# Altium PCB PCB1.PcbDoc
Units mm, origin at the board's own origin, x right, y up, seen from the top; angles counter-clockwise.
Board outline 139.5 x 60 mm, 4 copper layers (Top Layer, Signal Layer 1, Signal Layer 2, Bottom Layer), stack 1.57 mm thick; 143 components, 124 nets, 524 pads, 41 vias.
Unrouted connection lines stored in the file: 326.
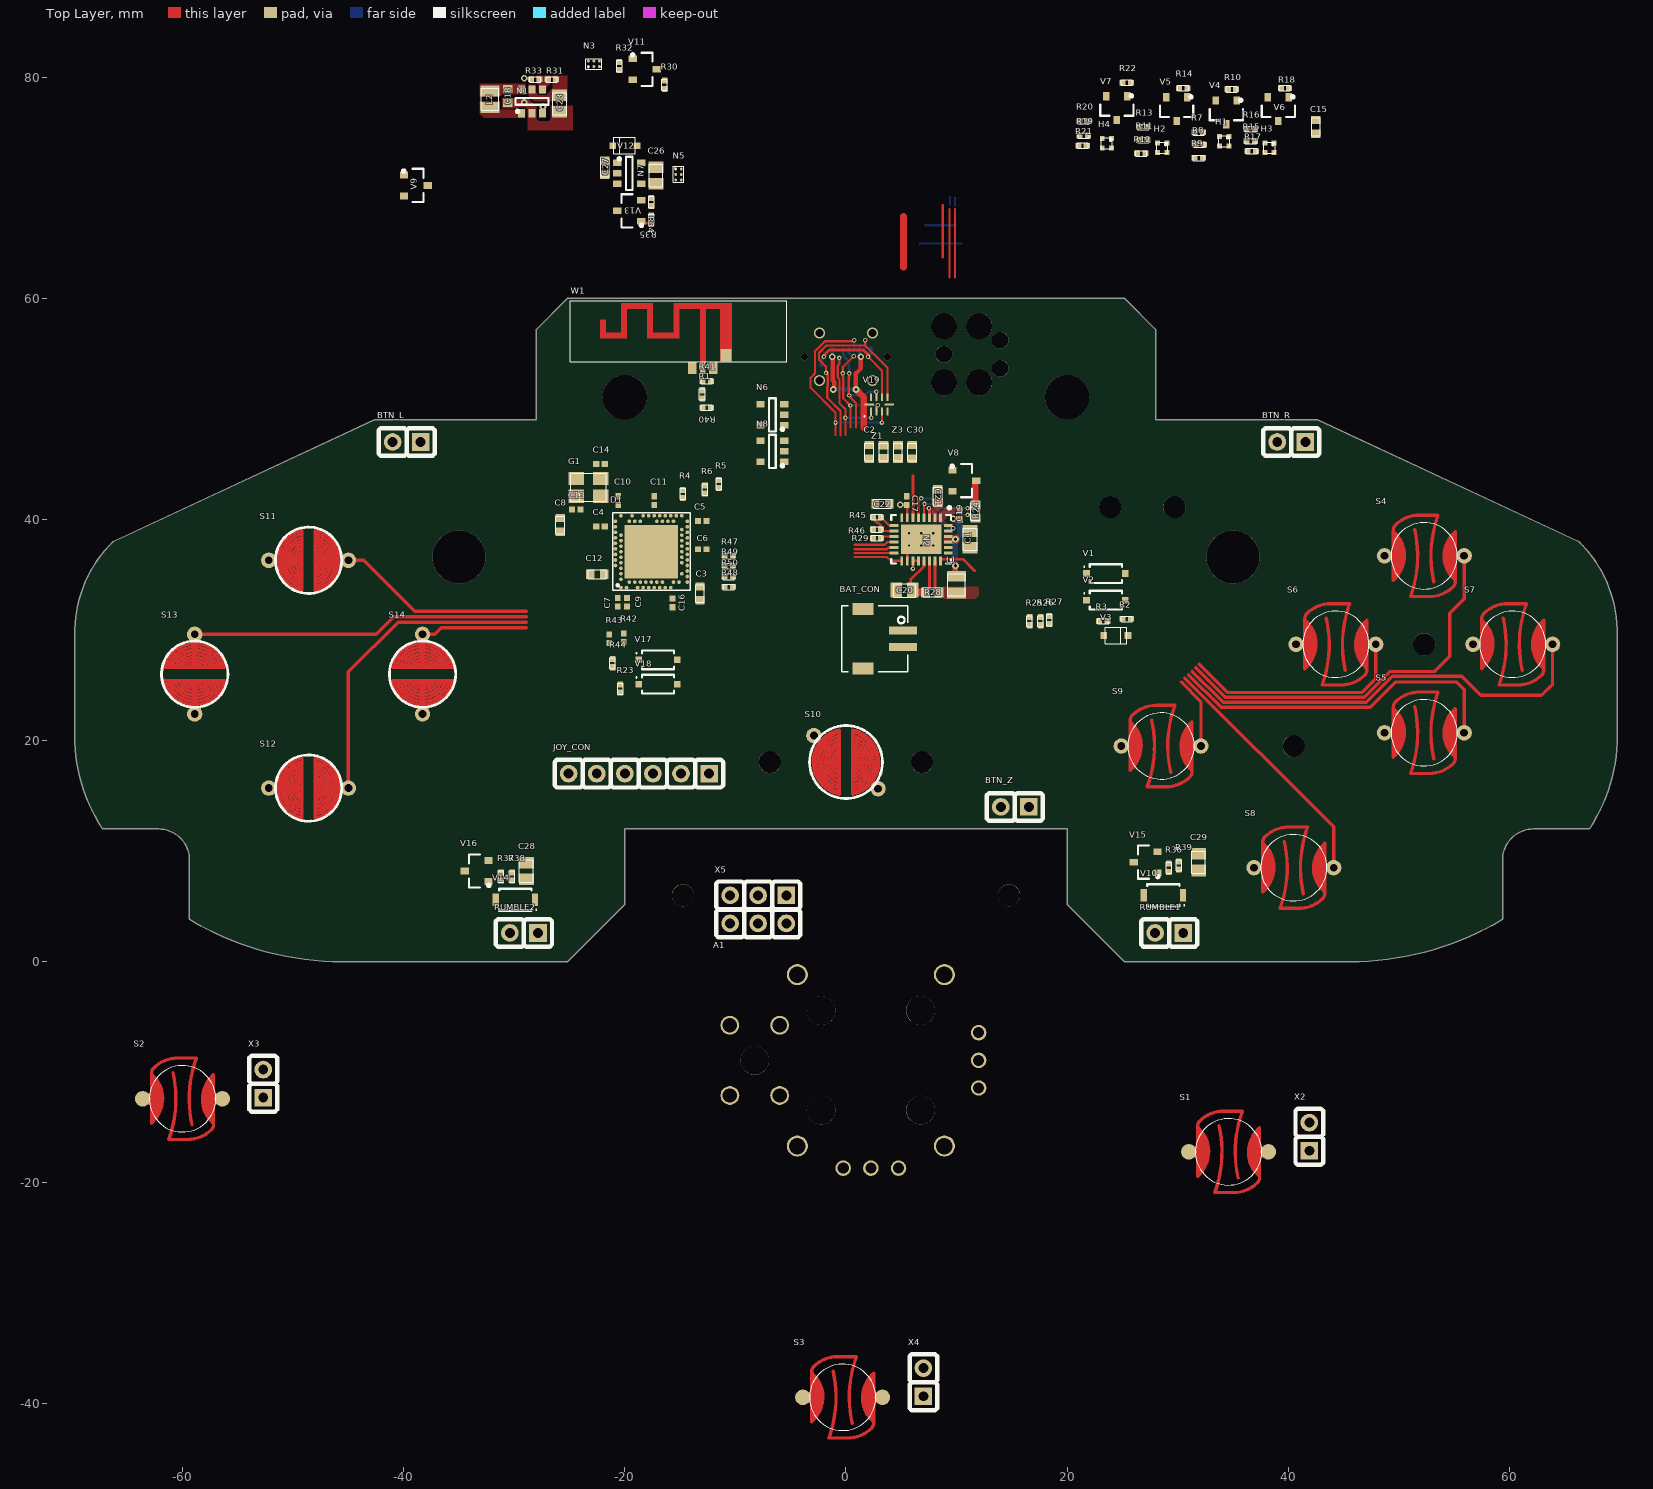
[diagram p0: Top Layer view]
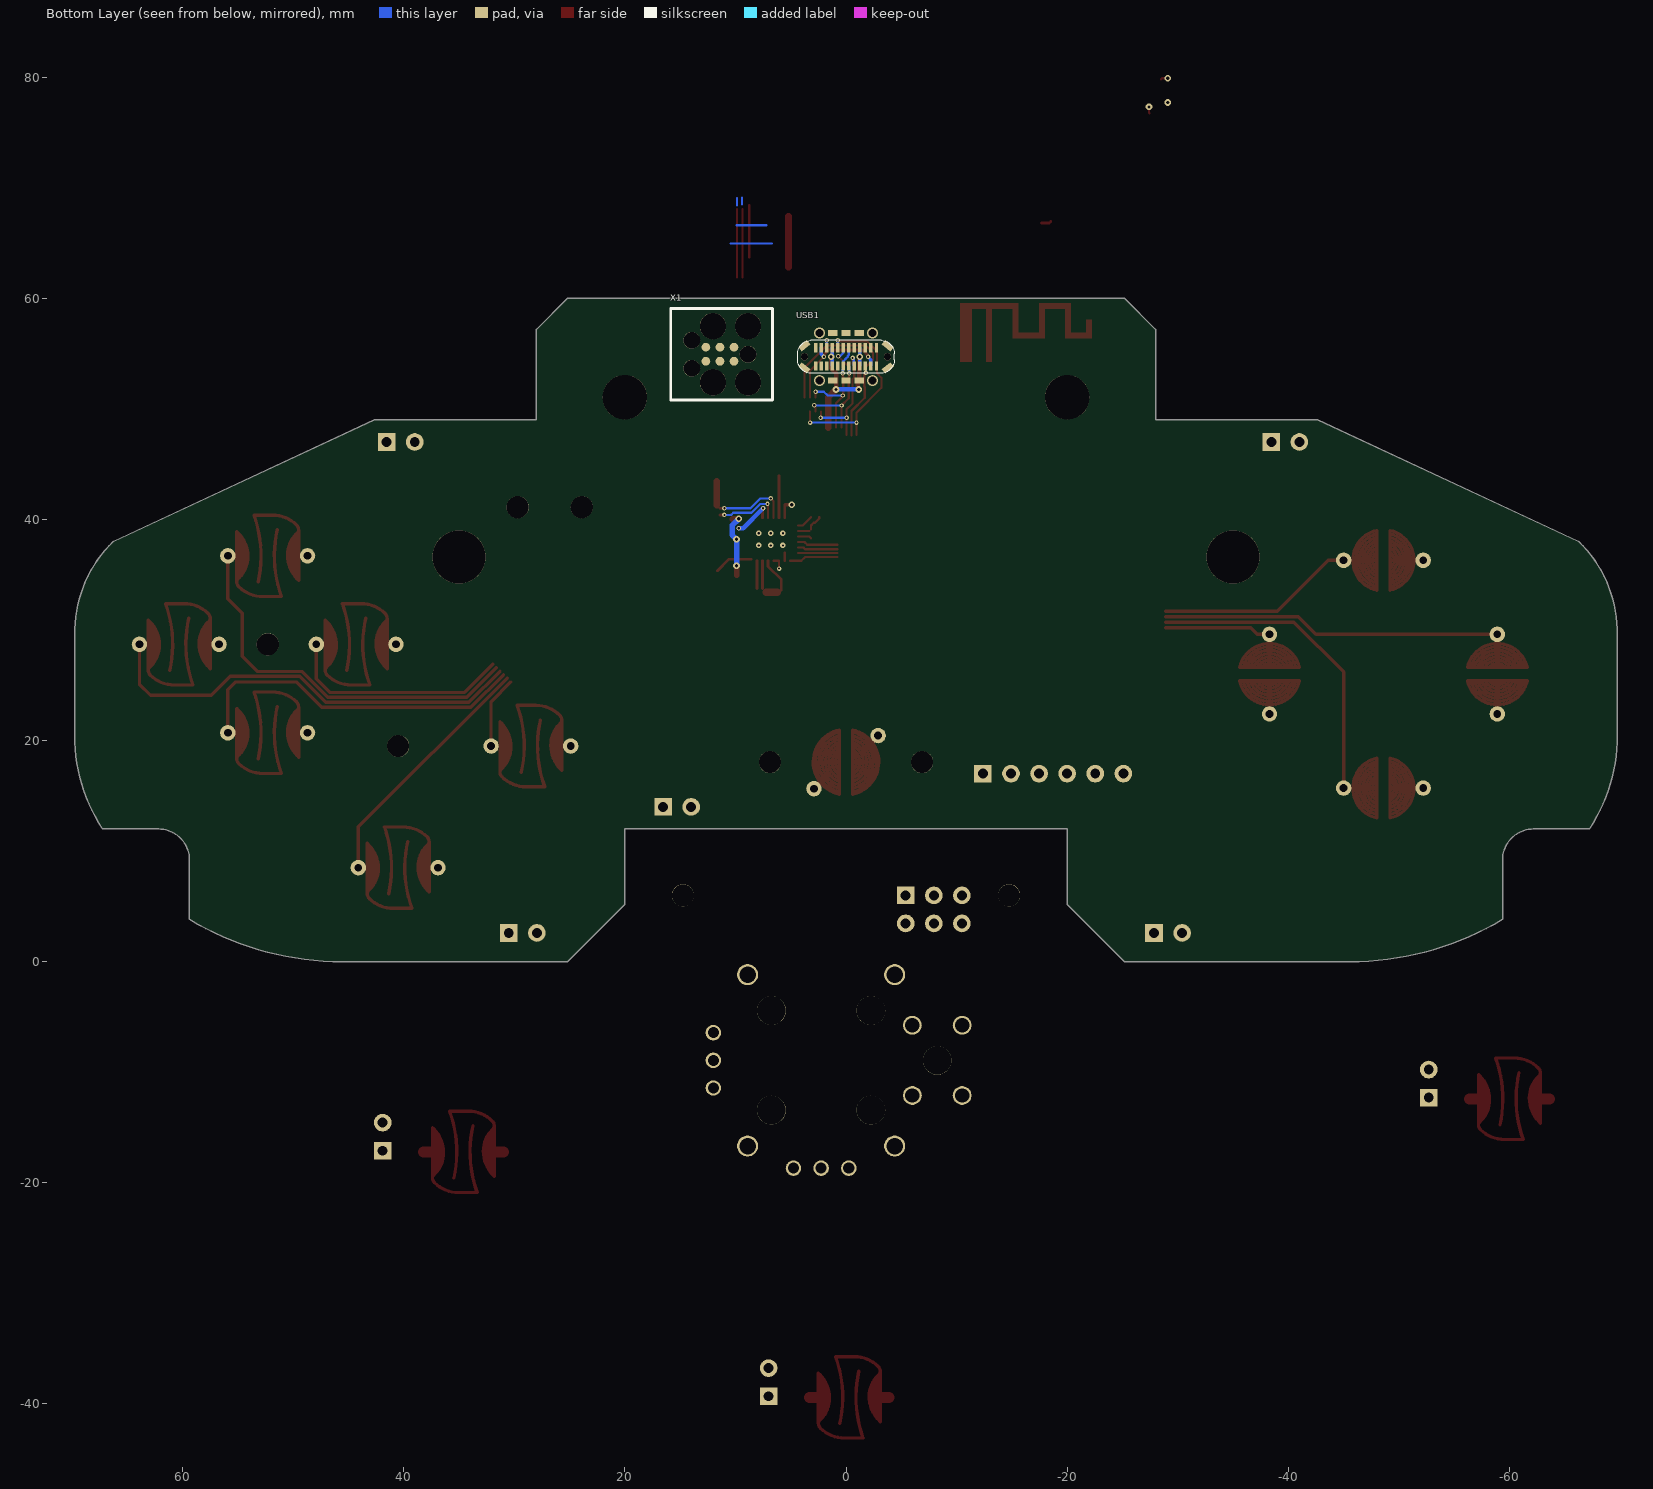
[diagram p1: Bottom Layer view, seen from below]

## Layer stack, top to bottom
Top Solder: solder mask 0.0102, Solder Resist, Dk 3.5
Top Layer: signal copper 0.035
Dielectric 1: prepreg 0.1, Dk 3.1
Signal Layer 1: signal copper 0.0175
Dielectric 3: core 1.265, FR-4, Dk 4.2
Signal Layer 2: signal copper 0.0175
Dielectric 5: prepreg 0.1, Dk 3.1
Bottom Layer: signal copper 0.035
Bottom Solder: solder mask 0.0102, Solder Resist, Dk 3.5

## Board outline
-59.375,3.85 -59.375,9.2 ccw(c-62.175,9.2) -62.175,12 -67.248,12 -67.239,12.006 cw(c-54.373,20.425) -69.748,20.5 -69.748,30.088 -69.742,30.075 cw(c-58.3,29.775) -66.268,37.992 -66.25,38 -42.65,49 -27.998,49 -27.998,57.175 -28,57.175 -25.173,60 25.175,60 28,57.175 28,49 42.652,49 66.252,38 66.27,37.992 cw(c58.302,29.775) 69.744,30.075 69.75,30.075 69.75,20.5 cw(c54.375,20.425) 67.241,12.006 67.25,12 62.177,12 ccw(c62.177,9.2) 59.377,9.2 59.377,3.85 59.368,3.827 cw(c45.574,26.761) 45.583,-0.002 45.574,0 25.2,0 20,5.2 20,12 -19.998,12 -19.998,5.2 -25.198,0 -45.572,0 -45.581,-0.002 cw(c-45.572,26.761)

## Design rules (kind name [scope] priority, off if disabled: settings)
Clearance [All] p1: gap=0.15 ignorepadtopadclearanceinfootprint=FALSE
ComponentClearance [All] p1: gap=0.1 collisioncheckmode=3 verticalgap=5 showdistances=FALSE
DiffPairsRouting DiffPair_DIFF90DiffPairsRouting [InDifferentialPairClass('DIFF90')] p1: maxlimit=0.3 minlimit=0.3 mostfreqgap=0.3 toplayer_minwidth=0.2 toplayer_maxwidth=0.2 toplayer_prefwidth=0.2 midlayer1_minwidth=0.2 midlayer1_maxwidth=0.2 midlayer1_prefwidth=0.2 midlayer2_minwidth=0.2 midlayer2_maxwidth=0.2 midlayer2_prefwidth=0.2 bottomlayer_minwidth=0.2 bottomlayer_maxwidth=0.2 bottomlayer_prefwidth=0.2 maxuncoupledlength=0.127
DiffPairsRouting [All] p2: maxlimit=0.254 minlimit=0.254 mostfreqgap=0.254 toplayer_minwidth=0.381 toplayer_maxwidth=0.381 toplayer_prefwidth=0.381 midlayer1_minwidth=0.381 midlayer1_maxwidth=0.381 midlayer1_prefwidth=0.381 midlayer2_minwidth=0.381 midlayer2_maxwidth=0.381 midlayer2_prefwidth=0.381 bottomlayer_minwidth=0.381 bottomlayer_maxwidth=0.381 bottomlayer_prefwidth=0.381 maxuncoupledlength=12.7
HoleSize [All] p1: absolutevalues=TRUE maxlimit=6 minlimit=0.3 maxpercent=80.000 minpercent=20.000
HoleToHoleClearance [All] p1: gap=0.3 allowstackedmicrovias=TRUE
MatchedLengths DiffPair_DIFF90MatchedLengths [InDifferentialPairClass('DIFF90')] p1: tolerance=0.127 checknetsindiffpair=TRUE checkdiffpairvsdiffpair=FALSE checkxsignals=FALSE checkothers=FALSE
MinimumSolderMaskSliver [All] p1 off: minsoldermaskwidth=0.2
PolygonConnect [All] p1: connectstyle=Direct reliefconductorwidth=0.254 reliefentries=4 polygonreliefangle="90 Angle" airgapwidth=0.254
RoomDefinition U_USB [InComponentClass('U_USB')] p1 off: confinementstyle=ConfineIn formatcopy=TRUE lockcomponents=FALSE outline -70,-10
RoomDefinition U_Rumble [InComponentClass('U_Rumble')] p2 off: confinementstyle=ConfineIn formatcopy=TRUE lockcomponents=FALSE outline -70,-10
RoomDefinition U_Power [InComponentClass('U_Power')] p3 off: confinementstyle=ConfineIn formatcopy=TRUE lockcomponents=FALSE outline -70,-10
RoomDefinition U_MCU [InComponentClass('U_MCU')] p4 off: confinementstyle=ConfineIn formatcopy=TRUE lockcomponents=FALSE outline -70,-10
RoomDefinition U_LEDs [InComponentClass('U_LEDs')] p5 off: confinementstyle=ConfineIn formatcopy=TRUE lockcomponents=FALSE outline -70,-10
RoomDefinition U_Buttons [InComponentClass('U_Buttons')] p6 off: confinementstyle=ConfineIn formatcopy=TRUE lockcomponents=FALSE outline -70,-10
RoutingVias [All] p1: holewidth=0.3 width=0.6 viastyle="Through Hole" minholewidth=0.2 minwidth=0.4 maxholewidth=0.7 maxwidth=1.4
SilkToSilkClearance [All] p1 off: silktosilkclearance=0.254
SilkToSolderMaskClearance [IsPad] p1 off: minsilkscreentomaskgap=0.254 clearancetoexposedcopper=TRUE
SolderMaskExpansion [All] p1: expansion=0.102
UnRoutedNet [All] p1: checkbadconnections=TRUE
Width Width_SINGLE50 [InNetClass('SINGLE50')] p1: maxlimit=0.22 minlimit=0.22 preferedwidth=0.22
Width [All] p2: maxlimit=1 minlimit=0.15 preferedwidth=0.2 midlayer1_maxwidth=0.7 midlayer2_maxwidth=0.7 minimp=50.000000 maximp=50.000000 favimp=50.000000
22 further rules are at their usual default settings.

## Classes and differential pairs
net class SINGLE50: ANT
component class U_USB: C2 C30 C900 USB1 V19 Z1 Z3 Z900
component class U_Rumble: C28 C29 R36 R37 R38 R39 R800 R801 R802 R803 RUMBLE1 RUMBLE2 V10 V14 V15 V16
component class U_Power: BAT_CON C1 C17 C18 C19 C20 C21 C22 C23 C26 C27 C700 C701 C702 C703 C704 C705 C706 C707 C708 C709 L1 L2 L701 N1 N2 N3 N5 N6 N7 N8 R24 R25 R26 R27 R28 R29 R30 R31 R32 R33 R34 R35 R45 R46 R700 R701 R702 R703 R704 R705 R706 R707 R708 R709 R710 V8 V9 V11 V12 V13
component class U_MCU: C3 C4 C5 C6 C7 C8 C9 C10 C11 C12 C13 C14 C16 C100 C101 C102 C103 C104 C105 C106 C107 C108 C109 D1 G1 R1 R2 R3 R4 R5 R6 R23 R40 R41 R42 R43 R44 R47 R48 R49 R50 R100 R101 V1 V2 V3 V17 V18 V100 V? W1 X1 Z100 Z101
component class U_LEDs: C15 C500 H1 H2 H3 H4 H500 H501 H502 H503 R7 R8 R9 R10 R11 R12 R13 R14 R15 R16 R17 R18 R19 R20 R21 R22 R500 R501 R502 R503 R504 R505 R506 R507 R508 R509 R510 R511 R512 R513 R514 R515 V4 V5 V6 V7
component class U_Buttons: A1 BTN_L BTN_R BTN_Z JOY_CON S1 S2 S3 S4 S5 S6 S7 S8 S9 S10 S11 S12 S13 S14 X2 X3 X4 X5
net class DIFF90: D_N D_P
differential pair class DIFF90: D
differential pair D: +D_P -D_N

## Components (designator, comment, footprint, x,y, rotation, side; value= is the part's Value field where it differs from the comment)
A1 "A_JOYSTICK_MODULE_RKJXK122400Y" A_JOYSTICK_MODULE_RKJXK122400Y 2.25,-8.925 r270 top
BAT_CON "X_SMD_SM4A_2PIN_MALE" SMD_CON_SM4A_2PIN_MALE 3,29.2 r270 top
BTN_L "X_CONNECTOR_P2.54_D0.9_1X2" THT_CON_P2.54_D0.9_1X2 -38.46,47 r180 top locked
BTN_R "X_CONNECTOR_P2.54_D0.9_1X2" THT_CON_P2.54_D0.9_1X2 41.54,47 r180 top locked
BTN_Z "X_CONNECTOR_P2.54_D0.9_1X2" THT_CON_P2.54_D0.9_1X2 16.54,14 r180 top
C1 "C_SMD_CER_4U7_35V_10%_X7R_0805" SMD_CAP_0805 11.2,38.2 r90 top value=4.7u
C2 "C_SMD_CER_1U_16V_10%_X7R_0603" SMD_CAP_0603 2.1,46.1 r270 top value=1u
C3 "C_SMD_CER_4U7_6V3_10%_X5R_0603" SMD_CAP_0603 -13.2,33.3 r90 top value=4.7u
C4 "C_SMD_CER_100N_25V_10%_X7R_0402" SMD_CAP_0402 -22.2,39.35 r0 top value=100n
C5 "C_SMD_CER_100N_25V_10%_X7R_0402" SMD_CAP_0402 -13,39.85 r180 top value=100n
C6 "C_SMD_CER_100N_25V_10%_X7R_0402" SMD_CAP_0402 -13,37.3 r180 top value=100n
C7 "C_SMD_CER_100N_25V_10%_X7R_0402" SMD_CAP_0402 -20.65,32.5 r90 top value=100n
C8 "C_SMD_CER_1U_16V_10%_X7R_0603" SMD_CAP_0603 -25.85,39.5 r90 top value=1u
C9 "C_SMD_CER_100N_25V_10%_X7R_0402" SMD_CAP_0402 -19.8,32.5 r270 top value=100n
C10 "C_SMD_CER_100P_50V_5%_NP0_0402" SMD_CAP_0402 -20.6,41.7 r270 top value=100p
C11 "C_SMD_CER_820P_50V_5%_NP0_0402" SMD_CAP_0402 -17.35,41.7 r270 top value=820p
C12 "C_SMD_CER_1U_16V_10%_X7R_0603" SMD_CAP_0603 -22.5,35.05 r0 top value=1u
C13 "C_SMD_CER_12P_50V_2%_NP0_0402" SMD_CAP_0402 -24.4,40.9 r180 top value=12p
C14 "C_SMD_CER_12P_50V_2%_NP0_0402" SMD_CAP_0402 -22.2,45 r0 top value=12p
C15 "C_SMD_CER_1U_16V_10%_X7R_0603" SMD_CAP_0603 42.5,75.5 r90 top value=1u
C16 "C_SMD_CER_100N_25V_10%_X7R_0402" SMD_CAP_0402 -15.7,32.45 r90 top value=100n
C17 "C_SMD_CER_100N_25V_10%_X7R_0402" SMD_CAP_0402 5.5,41.7 r270 top value=100n
C18 "C_SMD_CER_4U7_6V3_10%_X5R_0603" SMD_CAP_0603 -30.6,78.3 r90 top value=4.7u
C19 "C_SMD_CER_22N_50V_10%_X7R_0402" SMD_CAP_0402 10.3,40.4 r270 top value=22n
C20 "C_SMD_CER_10U_16V_10%_X7R_0805" SMD_CAP_0805 5.3,33.6 r0 top value=10u
C21 "C_SMD_CER_4U7_6V3_10%_X5R_0603" SMD_CAP_0603 8.3,42.1 r270 top value=4.7u
C22 "C_SMD_CER_1U_16V_10%_X7R_0603" SMD_CAP_0603 3.3,41.4 r0 top value=1u
C23 "C_SMD_CER_10U_16V_10%_X7R_0805" SMD_CAP_0805 -25.9,77.6 r90 top value=10u
C26 "C_SMD_CER_22U_16V_10%_X5R_0805" SMD_CAP_0805 -17.2,71.1 r90 top value=22u
C27 "C_SMD_CER_1U_16V_10%_X7R_0603" SMD_CAP_0603 -21.8,71.8 r90 top value=1u
C28 "C_SMD_CER_22U_16V_10%_X5R_0805" SMD_CAP_0805 -28.9,8.2 r270 top value=22u
C29 "C_SMD_CER_22U_16V_10%_X5R_0805" SMD_CAP_0805 31.9,9 r270 top value=22u
C30 "C_SMD_CER_1U_16V_10%_X7R_0603" SMD_CAP_0603 6,46.1 r270 top value=1u
D1 "D_NRF52840_aQFN-73" SMD_aQFN_73_nRF52840 -17.6,37.08 r90 top
G1 "G_SMD_OSC_XTAL_32MHZ_10PPM_8PF_40OHM" SMD_QUARZ_3.2X2.5 -23.3,42.9 r0 top value=32MHz
H1 "H_SMD_LED_RGB_DIFFUSED_5MA_0404" SMD_LED_0404 34.2,74.2 r0 top
H2 "H_SMD_LED_RGB_DIFFUSED_5MA_0404" SMD_LED_0404 28.599,73.6 r0 top
H3 "H_SMD_LED_RGB_DIFFUSED_5MA_0404" SMD_LED_0404 38.299,73.6 r0 top
H4 "H_SMD_LED_RGB_DIFFUSED_5MA_0404" SMD_LED_0404 23.6,74 r0 top
JOY_CON "X_CONNECTOR_P2.54_D0.9_1X6" THT_CON_P2.54_D0.9_1X6 -12.38,17 r180 top
L1 "L_SMD_FERRITE_SHIELD_4U7_1A_20%_0806" SMD_IND_0806 10,34.1 r270 top value=4.7uH
L2 "L_SMD_FERRITE_SHIELD_4U7_1A_20%_0806" SMD_IND_0806 -32.2,78 r270 top value=4.7uH
N1 "N_MCP16251T_SOT-23-6" SMD_SOT_23_6 -28.4,77.8 r90 top
N2 "N_LTC4162EUFD-LAD_QFN-28" QFN50P400X500X80_HS-29N 6.8,38.2 r270 top
N3 "" SMD_WLCSP_6_1.0X1.5 -22.8,81.2 r90 top
N5 "" SMD_WLCSP_6_1.0X1.5 -15.15,71.2 r0 top
N6 "N_MIC2775-46YM5-TR_SOT-23-5" SMD_SOT_23_5 -6.65,49.45 r180 top value=4.68V
N7 "AP2210K-3.3" SMD_SOT_23_5 -19.6,71.3 r0 top
N8 "N_ADM6319B31ARJZ-RL7_SOT-23-5" SMD_SOT_23_5 -6.65,46.15 r180 top value=3.08V
R1 "Dummy" SMD_RES_0402 -13,51.3 r90 top
R2 "R_SMD_THINFILM_10K_0W063_0%5_25PPM_0402" SMD_RES_0402 25.4,31 r0 top value=10k
R3 "R_SMD_THINFILM_10K_0W063_0%5_25PPM_0402" SMD_RES_0402 23.275,30.8 r0 top value=10k
R4 "R_SMD_THICKFILM_22E_0W063_1%_100PPM_0402" SMD_RES_0402 -14.75,42.3 r90 top value=22E
R5 "R_SMD_THICKFILM_22E_0W063_1%_100PPM_0402" SMD_RES_0402 -11.5,43.2 r90 top value=22E
R6 "R_SMD_THICKFILM_22E_0W063_1%_100PPM_0402" SMD_RES_0402 -12.75,42.7 r90 top value=22E
R7 "R_SMD_THINFILM_56E_0W063_0%5_50PPM_0402" SMD_RES_0402 31.9,75 r0 top value=56E
R8 "R_SMD_THINFILM_39E_0W063_0%5_50PPM_0402" SMD_RES_0402 32,73.9 r0 top value=39E
R9 "R_SMD_THINFILM_240E_0W063_0%5_25PPM_0402" SMD_RES_0402 31.9,72.7 r0 top value=240E
R10 "R_SMD_THINFILM_5K6_0W063_0%5_25PPM_0402" SMD_RES_0402 34.9,78.9 r180 top value=5.6k
R11 "R_SMD_THINFILM_56E_0W063_0%5_50PPM_0402" SMD_RES_0402 26.9,74.3 r0 top value=56E
R12 "R_SMD_THINFILM_39E_0W063_0%5_50PPM_0402" SMD_RES_0402 26.7,73.1 r0 top value=39E
R13 "R_SMD_THINFILM_240E_0W063_0%5_25PPM_0402" SMD_RES_0402 26.9,75.5 r0 top value=240E
R14 "R_SMD_THINFILM_5K6_0W063_0%5_25PPM_0402" SMD_RES_0402 30.5,79 r180 top value=5.6k
R15 "R_SMD_THINFILM_56E_0W063_0%5_50PPM_0402" SMD_RES_0402 36.6,74.2 r0 top value=56E
R16 "R_SMD_THINFILM_39E_0W063_0%5_50PPM_0402" SMD_RES_0402 36.6,75.3 r0 top value=39E
R17 "R_SMD_THINFILM_240E_0W063_0%5_25PPM_0402" SMD_RES_0402 36.7,73.3 r0 top value=240E
R18 "R_SMD_THINFILM_5K6_0W063_0%5_25PPM_0402" SMD_RES_0402 39.7,79 r180 top value=5.6k
R19 "R_SMD_THINFILM_56E_0W063_0%5_50PPM_0402" SMD_RES_0402 21.5,74.7 r0 top value=56E
R20 "R_SMD_THINFILM_39E_0W063_0%5_50PPM_0402" SMD_RES_0402 21.5,76 r0 top value=39E
R21 "R_SMD_THINFILM_240E_0W063_0%5_25PPM_0402" SMD_RES_0402 21.4,73.8 r0 top value=240E
R22 "R_SMD_THINFILM_5K6_0W063_0%5_25PPM_0402" SMD_RES_0402 25.4,79.5 r180 top value=5.6k
R23 "R_SMD_THICKFILM_22E_0W063_1%_100PPM_0402" SMD_RES_0402 -20.4,24.7 r90 top value=22E
R24 "R_SMD_THINFILM_0E068_0W25_1%_350PPM_0603" SMD_RES_0603 11.7,40.7 r270 top value=68m
R25 "R_SMD_THINFILM_10K_0W063_0%5_25PPM_0402" SMD_RES_0402 16.599,30.8 r90 top value=10k
R26 "R_SMD_THINFILM_10K_0W063_0%5_25PPM_0402" SMD_RES_0402 17.6,30.8 r90 top value=10k
R27 "R_SMD_THINFILM_10K_0W063_0%5_25PPM_0402" SMD_RES_0402 18.4,30.9 r90 top value=10k
R28 "R_SMD_THICKFILM_0E047_0W2_1%_200PPM_0603" SMD_RES_0603 7.8,33.4 r0 top value=47m
R29 "R_SMD_THINFILM_47K_0W1_0%5_25PPM_0402" SMD_RES_0402 2.8,38.3 r0 top value=47k
R30 "R_SMD_THINFILM_100K_0W063_1%_50PPM_0402" SMD_RES_0402 -16.4,79.3 r90 top value=100k
R31 "R_SMD_THINFILM_1M5_0W063_1%_50PPM_0402" SMD_RES_0402 -26.6,79.8 r180 top value=1.5M
R32 "R_SMD_THINFILM_100K_0W063_1%_50PPM_0402" SMD_RES_0402 -20.5,81 r90 top value=100k
R33 "R_SMD_THICKFILM_910K_0W063_1%_100PPM_0402" SMD_RES_0402 -28.1,79.8 r0 top value=910k
R34 "R_SMD_THINFILM_100K_0W063_1%_50PPM_0402" SMD_RES_0402 -17.6,68.7 r270 top value=100k
R35 "R_SMD_THINFILM_100K_0W063_1%_50PPM_0402" SMD_RES_0402 -17.6,67.1 r270 top value=100k
R36 "R_SMD_THINFILM_10E_0W063_0%5_50PPM_0402" SMD_RES_0402 29.2,8.5 r270 top value=10E
R37 "R_SMD_THINFILM_10E_0W063_0%5_50PPM_0402" SMD_RES_0402 -31.2,7.7 r270 top value=10E
R38 "R_SMD_THINFILM_100K_0W063_1%_50PPM_0402" SMD_RES_0402 -30.2,7.7 r270 top value=100k
R39 "R_SMD_THINFILM_100K_0W063_1%_50PPM_0402" SMD_RES_0402 30.1,8.7 r270 top value=100k
R40 "Dummy" SMD_RES_0402 -12.6,50.1 r180 top
R41 "Dummy" SMD_RES_0402 -12.6,52.5 r180 top
R42 "R_SMD_THINFILM_5K1_0W063_0%5_25PPM_0402" SMD_CAP_0402 -20.1,29.3 r90 top value=5.1k
R43 "R_SMD_THINFILM_5K1_0W063_0%5_25PPM_0402" SMD_CAP_0402 -21.4,29.2 r90 top value=5.1k
R44 "R_SMD_THICKFILM_22E_0W063_1%_100PPM_0402" SMD_RES_0402 -21.1,27 r90 top value=22E
R45 "R_SMD_THINFILM_1K_0W063_0%5_25PPM_0402" SMD_RES_0402 2.8,40.2 r180 top value=1k
R46 "R_SMD_THINFILM_1K_0W063_0%5_25PPM_0402" SMD_RES_0402 2.8,39.1 r0 top value=1k
R47 "R_SMD_THINFILM_10K_0W063_0%5_25PPM_0402" SMD_RES_0402 -10.6,36.7 r180 top value=10k
R48 "R_SMD_THINFILM_10K_0W063_0%5_25PPM_0402" SMD_RES_0402 -10.6,33.9 r180 top value=10k
R49 "R_SMD_THINFILM_10K_0W063_0%5_25PPM_0402" SMD_RES_0402 -10.6,35.8 r0 top value=10k
R50 "R_SMD_THINFILM_10K_0W063_0%5_25PPM_0402" SMD_RES_0402 -10.6,34.8 r0 top value=10k
RUMBLE1 "X_CONNECTOR_P2.54_D0.9_1X2" THT_CON_P2.54_D0.9_1X2 30.5,2.6 r180 top
RUMBLE2 "X_CONNECTOR_P2.54_D0.9_1X2" THT_CON_P2.54_D0.9_1X2 -27.86,2.6 r180 top
S1 "S_N64_FINGER_CARBON_CONTACT" SMD_N64_FINGER_CARBON_CONTACT#1 34.599,-17.2 r0 top
S2 "S_N64_FINGER_CARBON_CONTACT" SMD_N64_FINGER_CARBON_CONTACT#1 -60,-12.4 r0 top
S3 "S_N64_FINGER_CARBON_CONTACT" SMD_N64_FINGER_CARBON_CONTACT#1 -0.3,-39.4 r0 top
S4 "S_N64_FINGER_CARBON_CONTACT" SMD_N64_FINGER_CARBON_CONTACT#2 52.3,36.7 r0 top locked
S5 "S_N64_FINGER_CARBON_CONTACT" SMD_N64_FINGER_CARBON_CONTACT#2 52.3,20.7 r0 top locked
S6 "S_N64_FINGER_CARBON_CONTACT" SMD_N64_FINGER_CARBON_CONTACT#2 44.3,28.7 r0 top locked
S7 "S_N64_FINGER_CARBON_CONTACT" SMD_N64_FINGER_CARBON_CONTACT#2 60.3,28.7 r0 top locked
S8 "S_N64_FINGER_CARBON_CONTACT" SMD_N64_FINGER_CARBON_CONTACT#2 40.5,8.5 r0 top locked
S9 "S_N64_FINGER_CARBON_CONTACT" SMD_N64_FINGER_CARBON_CONTACT#2 28.5,19.5 r0 top locked
S10 "S_N64_START_CARBON_CONTACT" SMD_N64_START_CARBON_CONTACT 0,18.05 r0 top locked
S11 "S_N64_DPAD_CARBON_CONTACT" SMD_N64_DPAD_CARBON_CONTACT -48.6,36.3 r0 top locked
S12 "S_N64_DPAD_CARBON_CONTACT" SMD_N64_DPAD_CARBON_CONTACT -48.6,15.7 r0 top locked
S13 "S_N64_DPAD_CARBON_CONTACT" SMD_N64_DPAD_CARBON_CONTACT -58.9,26 r90 top locked
S14 "S_N64_DPAD_CARBON_CONTACT" SMD_N64_DPAD_CARBON_CONTACT -38.3,26 r90 top locked
USB1 "" SMD_CON_USB_TYPEC_VERTICAL_10132328-10011LF 0,54.7 r0 bottom
V1 "V_SMD_SCHOTTKY_BAT42W-7-F_30V_0A2_SOD-123" SMD_SOD_123 23.5,35.1 r0 top value=30V
V2 "V_SMD_SCHOTTKY_BAT42W-7-F_30V_0A2_SOD-123" SMD_SOD_123 23.5,32.7 r0 top value=30V
V3 "V_SMD_DIODE_1N914_75V_0A15_SOD-323" SMD_SOD_323 23.3,29.5 r0 top
V4 "V_SMD_TRANS_PNP_BC857B_45V_0A1_SOT-23-3" SMD_SOT_23_3 34.4,76.8 r270 top
V5 "V_SMD_TRANS_PNP_BC857B_45V_0A1_SOT-23-3" SMD_SOT_23_3 29.9,77.1 r270 top
V6 "V_SMD_TRANS_PNP_BC857B_45V_0A1_SOT-23-3" SMD_SOT_23_3 39.1,77.1 r270 top
V7 "V_SMD_TRANS_PNP_BC857B_45V_0A1_SOT-23-3" SMD_SOT_23_3 24.5,77.2 r270 top
V8 "V_SMD_FET_NMOS_FDN357N_30V_1A9_4NC2_0W5_SOT-23-3" SMD_SOT_23_3 10.7,43.5 r0 top
V9 "V_SMD_FET_NMOS_FDN357N_30V_1A9_4NC2_0W5_SOT-23-3" SMD_SOT_23_3 -38.9,70.2 r0 top
V10 "V_SMD_DIODE_1N4007_SODFL-123" SMD_SODFL_123 28.7,6 r0 top
V11 "V_SMD_TRANS_NPN_BC847B_50V_0A2_SOT-23-3" SMD_SOT_23_3 -18.201,80.7 r0 top
V12 "V_SMD_DIODE_1N914_75V_0A15_SOD-323" SMD_SOD_323 -18.9,73.8 r180 top
V13 "V_SMD_TRANS_NPN_BC847B_50V_0A2_SOT-23-3" SMD_SOT_23_3 -19.6,67.9 r180 top
V14 "V_SMD_DIODE_1N4007_SODFL-123" SMD_SODFL_123 -29.9,5.6 r0 top
V15 "V_SMD_FET_NMOS_FDN357N_30V_1A9_4NC2_0W5_SOT-23-3" SMD_SOT_23_3 27.101,9 r180 top
V16 "V_SMD_FET_NMOS_FDN357N_30V_1A9_4NC2_0W5_SOT-23-3" SMD_SOT_23_3 -33.399,8.2 r180 top
V17 "V_SMD_SCHOTTKY_BAT42W-7-F_30V_0A2_SOD-123" SMD_SOD_123 -17,27.3 r0 top value=30V
V18 "V_SMD_SCHOTTKY_BAT42W-7-F_30V_0A2_SOD-123" SMD_SOD_123 -17,25.1 r0 top value=30V
V19 "V_SMD_TVS_TPD6E001RSER_UQFN-10" SMD_UQFN-10 3,50.4 r90 top
W1 "W_BLUETOOTH_IFA_1MM" BLUETOOTH_IFA_1MM -10.35,54.25 r0 top
X1 "X_J-LINK_6-PIN_NEEDLE_HEADER" SMD_J-LINK_6-PIN_NEEDLE 8.86,54.935 r0 bottom
X2 "X_CONNECTOR_P2.54_D0.9_1X2" THT_CON_P2.54_D0.9_1X2 41.899,-17.1 r90 top
X3 "X_CONNECTOR_P2.54_D0.9_1X2" THT_CON_P2.54_D0.9_1X2 -52.701,-12.3 r90 top
X4 "X_CONNECTOR_P2.54_D0.9_1X2" THT_CON_P2.54_D0.9_1X2 7,-39.3 r90 top
X5 "X_CONNECTOR_P2.54_D0.9_2X3" THT_CON_P2.54_D0.9_2X3 -5.4,3.46 r180 top
Z1 "Z_SMD_FERRITE_2A_220E@100MHZ_0603" SMD_RES_0603 3.4,46.1 r270 top value=220E
Z3 "Z_SMD_FERRITE_2A_220E@100MHZ_0603" SMD_RES_0603 4.7,46.1 r270 top value=220E

## Footprints (in the part's own frame and the unit in brackets; to place one, negate y for a bottom-side part, rotate by r counter-clockwise, add the part's x,y. Pads: shape width x height; smd on the part's side, far side on the other; paste and mask are expansions set on the pad)
A_JOYSTICK_MODULE_RKJXK122400Y [mm] "ThumbPointer™ (Stick Controller) RKJXK/RKJXV Series"
  round 1.4 hole 1: 1(2.5,9.75) 2(0,9.75) 3(-2.5,9.75) 4(9.75,-2.5) 5(9.75,0) 6(9.75,2.5)
  round 1.7 hole 1.3: 7(-3.175,-12.75) 8(3.175,-12.75) 9(3.175,-8.25) 10(-3.175,-8.25)
  round 1.9 hole 1.5: 11(-7.75,6.65) 11(-7.75,-6.65) 11(7.75,6.65) 11(7.75,-6.65)
  round 2.6 hole 2.6 unplated paste+0 mask+0: 12(-4.5,4.5) 12(-4.5,-4.5) 12(0,-10.5) 12(4.5,4.5) 12(4.5,-4.5)
  body extent -9.53,-14.34 11.22,11.23, height 3.7
BLUETOOTH_IFA_1MM [mm]
  rect 0.8x1.1 smd: 1(-3.55,-0.55) 1(-1.65,-0.55)
  rect 1x1.1 smd paste-1 mask-1: 1(-0.5,0.6)
  rect 0.5x1.1 smd paste-1 mask-1: 2(-2.6,-0.55)
  Top Layer region: 0,0 0,5.3 -5.22,5.3 -5.22,2.65 -7.12,2.65 -7.12,5.3 -9.97,5.3 -9.97,2.65 -11.38,2.65 -11.38,3.8 -11.88,3.8 -11.88,2.14 -9.47,2.14 -9.47,4.8 -7.62,4.8 -7.62,2.14 -4.72,2.14 -4.72,4.8 -2.85,4.8 -2.85,0 -2.35,0 -2.35,4.8 -1,4.8 -1,0
  silkscreen extent -14.6,0 5,5.5
QFN50P400X500X80_HS-29N [mm] "QFN, 28-Leads, Body 4.00x5.00mm, Pitch 0.50mm, Thermal Pad 2.65x3.65mm, IPC Medium Density"
  rect 0.8x0.25 smd: 1(-1.95,1.75) 2(-1.95,1.25) 3(-1.95,0.75) 4(-1.95,0.25) 5(-1.95,-0.25) 6(-1.95,-0.75) 7(-1.95,-1.25) 8(-1.95,-1.75) 15(1.95,-1.75) 16(1.95,-1.25) 17(1.95,-0.75) 18(1.95,-0.25) 19(1.95,0.25) 20(1.95,0.75) 21(1.95,1.25) 22(1.95,1.75)
  rect 0.25x0.8 smd: 9(-1.25,-2.45) 10(-0.75,-2.45) 11(-0.25,-2.45) 12(0.25,-2.45) 13(0.75,-2.45) 14(1.25,-2.45) 23(1.25,2.45) 24(0.75,2.45) 25(0.25,2.45) 26(-0.25,2.45) 27(-0.75,2.45) 28(-1.25,2.45)
  rect 2.65x3.65 smd: 29(0,0)
  silkscreen extent -2.97,-2.7 2.2,2.7, body extent -2.05,-2.55 2.05,2.55, height 0.8
SMD_aQFN_73_nRF52840 [mm]
  round 0.33 smd: A8(-1.25,3.25) A10(-0.75,3.25) A12(-0.25,3.25) A14(0.25,3.25) A16(0.75,3.25) A18(1.25,3.25) A20(1.75,3.25) A22(2.25,3.25) A23(2.75,3.25) AA24(3.25,-2.25) AB2(-2.75,-2.5) AC5(-2,-2.75) AC9(-1,-2.75) AC11(-0.5,-2.75) AC13(0,-2.75) AC15(0.5,-2.75) AC17(1,-2.75) AC19(1.5,-2.75) AC21(2,-2.75) AC24(3.25,-2.75) AD2(-2.75,-3.25) AD4(-2.25,-3.25) AD6(-1.75,-3.25) AD8(-1.25,-3.25) AD10(-0.75,-3.25) AD12(-0.25,-3.25) AD14(0.25,-3.25) AD16(0.75,-3.25) AD18(1.25,-3.25) AD20(1.75,-3.25) AD22(2.25,-3.25) AD23(2.75,-3.25) B1(-3.25,2.75) B3(-2.5,2.75) B5(-2,2.75) B7(-1.5,2.75) B9(-1,2.75) B11(-0.5,2.75) B13(0,2.75) B15(0.5,2.75) B17(1,2.75) B19(1.5,2.75) B24(3.25,2.75) C1(-3.25,2.25) D2(-2.75,2) D23(2.75,2) E24(3.25,1.75) F2(-2.75,1.5) F23(2.75,1.5) G1(-3.25,1.25) H2(-2.75,1) H23(2.75,1) J1(-3.25,0.75) J24(3.25,0.75) K2(-2.75,0.5) L1(-3.25,0.25) L24(3.25,0.25) M2(-2.75,0) N1(-3.25,-0.25) N24(3.25,-0.25) P2(-2.75,-0.5) P23(2.75,-0.5) R1(-3.25,-0.75) R24(3.25,-0.75) T2(-2.75,-1) T23(2.75,-1) U1(-3.25,-1.25) U24(3.25,-1.25) V23(2.75,-1.5) W1(-3.25,-1.75) W24(3.25,-1.75) Y2(-2.75,-2) Y23(2.75,-2)
  rect 4.85x4.85 smd: EXP(0,0)
  silkscreen extent -3.5,-3.5 3.5,3.5
SMD_CAP_0402 [mm] "Chip Capacitor, 2-Leads, Body 1.00x0.50mm, IPC High Density"
  rect 0.56x0.52 smd: 1(-0.39,0) 2(0.39,0)
  body extent -0.53,-0.28 0.53,0.28, height 0.55
SMD_CAP_0603 [mm]
  rect 0.75x0.85 smd: 1(-0.625,0) 2(0.625,0)
  silkscreen extent -0.8,-0.4 0.8,0.4, body extent -0.85,-0.45 0.85,0.45, height 0.8
SMD_CAP_0805 [mm]
  rect 1.05x1.35 smd: 1(-0.75,0) 2(0.75,0)
  silkscreen extent -1,-0.65 1,0.6, body extent -1.08,-0.7 1.07,0.7, height 1.4
SMD_CON_SM4A_2PIN_MALE [mm] "Connector Header Surface Mount, Right Angle 2 position 0.059\" (1.50mm)"
  rect 0.7x2.5 smd: 1(-0.75,2.15) 2(0.75,2.15)
  rect 1.1x1.9 smd: S1(-2.7,-1.45) S2(2.7,-1.45)
  silkscreen extent -3,-3.4 3,2.6, body extent -3,-3.36 3,3.14, height 3.7
SMD_CON_USB_TYPEC_VERTICAL_10132328-10011LF [mm] "USB - C (Type - C) USB 3.1 (USB 3.1 Gen 2, Superspeed+) Receptacle Connector 24 Position Surface Mount, Through Hole"
  rect 1.03x0.5 smd rot 141: 1(-3.77,-1) 1(3.77,1)
  rect 1.03x0.5 smd rot 39: 1(-3.77,1) 1(3.77,-1)
  round 0.66 hole 0.66 unplated paste+0 mask+0: 1(-3.75,0) 1(3.75,0)
  round 1 hole 0.7: 1(-2.4,-2.15) 1(-2.4,2.15) 1(2.4,-2.15) 1(2.4,2.15)
  rect 0.82x0.55 smd: 1(-1.2,-2.15) 1(-1.2,2.15) 1(0,-2.15) 1(0,2.15) 1(1.2,-2.15) 1(1.2,2.15)
  rect 0.3x0.85 smd: A1(-2.75,0.83) A2(-2.25,0.83) A3(-1.75,0.83) A4(-1.25,0.83) A5(-0.75,0.83) A6(-0.25,0.83) A7(0.25,0.83) A8(0.75,0.83) A9(1.25,0.83) A10(1.75,0.83) A11(2.25,0.83) A12(2.75,0.83) B1(2.75,-0.83) B2(2.25,-0.83) B3(1.75,-0.83) B4(1.25,-0.83) B5(0.75,-0.83) B6(0.25,-0.83) B7(-0.25,-0.83) B8(-0.75,-0.83) B9(-1.25,-0.83) B10(-1.75,-0.83) B11(-2.25,-0.83) B12(-2.75,-0.83)
  silkscreen extent -4.37,-1.48 4.37,1.48, body extent -4.37,-2.25 4.37,2.25, height 8.8
SMD_IND_0806 [mm]
  rect 0.99x1.72 smd: 1(-0.755,0) 2(0.755,0)
  silkscreen extent -1,-0.8 1,0.8, body extent -1.1,-0.9 1.1,0.9, height 1
SMD_J-LINK_6-PIN_NEEDLE [mm]
  round 2.375 hole 2.375 unplated paste-2.375 mask-2.375: 0(0,-2.54) 0(0,2.54) 0(3.175,-2.54) 0(3.175,2.54)
  round 1.524 hole 1.524 unplated paste-1.524 mask-1.524: 0(0,0) 0(5.08,-1.27) 0(5.08,1.27)
  round 0.787 smd paste-0.393: 1(1.27,-0.635) 2(1.27,0.635) 3(2.54,-0.635) 4(2.54,0.635) 5(3.81,-0.635) 6(3.81,0.635)
  silkscreen extent -2.22,-4.13 6.98,4.13
SMD_LED_0404 [mm]
  rect 0.45x0.45 smd: 1(0.425,0.425) 2(0.425,-0.425) 3(-0.425,-0.425) 4(-0.425,0.425)
  silkscreen extent -0.5,-0.5 0.5,0.5, body extent -0.5,-0.5 0.5,0.5, height 0.2
SMD_N64_DPAD_CARBON_CONTACT [mm]
  round 1.4 hole 0.7: 1(-3.6,0) 2(3.6,0)
  Top Layer lines w0.3: -3.6,0 -2.766,0 ; -0.657,2.064 ccw(c0,0) -2.166,0 ; -0.651,-1.086 cw(c0,0) -1.266,0 ; -0.651,1.086 ccw(c0,0) -1.266,0 ; -0.636,1.431 ccw(c0,0) -1.566,0 ; -0.632,-0.211 cw(c0,0) -0.666,0 ; -0.632,0.211 ccw(c0,0) -0.666,0 ; -0.629,-0.733 cw(c0,0) -0.966,0 ; -0.629,0.733 ccw(c0,0) -0.966,0 ; -0.622,-2.386 cw(c0,0) -2.466,0 ; -0.622,-2.075 cw(c0,0) -2.166,0 ; -0.622,2.386 ccw(c0,0) -2.466,0 ; -0.621,-1.76 cw(c0,0) -1.866,0 ; -0.621,1.76 ccw(c0,0) -1.866,0 ; -0.617,-1.439 cw(c0,0) -1.566,0 ; 0.617,1.439 cw(c0,0) 1.566,0 ; 0.621,-1.76 ccw(c0,0) 1.866,0 ; 0.621,1.76 cw(c0,0) 1.866,0 ; 0.622,-2.386 ccw(c0,0) 2.466,0 ; 0.622,2.075 cw(c0,0) 2.166,0 ; 0.622,2.386 cw(c0,0) 2.466,0 ; 0.629,-0.733 ccw(c0,0) 0.966,0 ; 0.629,0.733 cw(c0,0) 0.966,0 ; 0.632,-0.211 ccw(c0,0) 0.666,0 ; 0.632,0.211 cw(c0,0) 0.666,0 ; 0.636,-1.431 ccw(c0,0) 1.566,0 ; 0.651,-1.086 ccw(c0,0) 1.266,0 ; 0.651,1.086 cw(c0,0) 1.266,0 ; 0.657,-2.064 ccw(c0,0) 2.166,0 ; 3.6,0 2.766,0 ; -2.766,0 cw(c0,0) -0.6,2.7 -0.6,0 ; -2.766,0 ccw(c0,0) -0.6,-2.7 -0.6,0 ; -2.766,0 -2.466,0 ; -2.466,0 -2.166,0 ; -2.166,0 -1.866,0 ; -1.866,0 -1.566,0 ; -1.566,0 -1.266,0 ; -1.266,0 -0.966,0 ; -0.966,0 -0.666,0 ; -0.666,0 -0.6,0 ; 0.6,0 0.6,2.7 cw(c0,0) 2.766,0 ; 0.6,0 0.666,0 ; 0.6,0 0.6,-2.7 ccw(c0,0) 2.766,0 ; 0.666,0 0.966,0 ; 0.966,0 1.266,0 ; 1.266,0 1.566,0 ; 1.566,0 1.866,0 ; 1.866,0 2.166,0 ; 2.166,0 2.466,0 ; 2.466,0 2.766,0
  silkscreen extent -3,-3 3,3
SMD_N64_FINGER_CARBON_CONTACT#1 [mm]
  round 1.4 smd: 1(-3.6,0) 2(3.6,0)
  Top Layer lines w0.3: -3.6,0 -2.8,0 ; -0.862,2.364 cw(c-11.4,0) -1.247,-3.683 0.447,-3.683 ccw(c0.447,-0.617) 2.615,-2.785 ccw(c2.169,-2.339) 2.8,-2.339 ; 0.862,-2.364 cw(c11.4,0) 1.247,3.683 -0.447,3.683 ccw(c-0.447,0.617) -2.615,2.785 ccw(c-2.169,2.339) -2.8,2.339 ; 3.6,0 2.8,0 ; -2.8,0 -2.8,2.339 ; -2.8,0 -2.8,-2.2 -2.698,-2.098 ccw(c-4.866,0.07) -1.8,0.07 ccw(c-4.528,0.07) -2.599,1.999 -2.702,2.102 cw(c-2.465,2.339) -2.8,2.339 ; 2.8,-2.339 ccw(c2.465,-2.339) 2.702,-2.102 2.599,-1.999 cw(c4.528,-0.07) 1.8,-0.07 cw(c4.866,-0.07) 2.698,2.098 2.8,2.2 2.8,0 ; 2.8,-2.339 2.8,0
  Top Layer lines w0.4: -2.708,-1.671 ccw(c-4.7,0) -2.697,1.658 ; 2.697,-1.658 cw(c4.7,0) 2.708,1.671
  Top Layer lines w0.45: -2.703,-1.141 ccw(c-4.7,0) -2.703,1.141 ; -2.657,-0.51 ccw(c-4.9,0) -2.648,0.469 ; 2.648,-0.469 cw(c4.9,0) 2.657,0.51 ; 2.703,-1.141 cw(c4.7,0) 2.703,1.141
  Top Layer lines w1: -3.6,0 -2.8,0 ; 2.8,0 3.6,0
  silkscreen extent -3,-3 3,3
SMD_N64_FINGER_CARBON_CONTACT#2 [mm]
  round 1.4 hole 0.7: 1(-3.6,0) 2(3.6,0)
  Top Layer lines w0.3: -3.6,0 -2.8,0 ; -0.862,2.364 cw(c-11.4,0) -1.247,-3.683 0.447,-3.683 ccw(c0.447,-0.617) 2.615,-2.785 ccw(c2.169,-2.339) 2.8,-2.339 ; 0.862,-2.364 cw(c11.4,0) 1.247,3.683 -0.447,3.683 ccw(c-0.447,0.617) -2.615,2.785 ccw(c-2.169,2.339) -2.8,2.339 ; 3.6,0 2.8,0 ; -2.8,0 -2.8,2.339 ; -2.8,0 -2.8,-2.2 -2.698,-2.098 ccw(c-4.866,0.07) -1.8,0.07 ccw(c-4.528,0.07) -2.599,1.999 -2.702,2.102 cw(c-2.465,2.339) -2.8,2.339 ; 2.8,-2.339 ccw(c2.465,-2.339) 2.702,-2.102 2.599,-1.999 cw(c4.528,-0.07) 1.8,-0.07 cw(c4.866,-0.07) 2.698,2.098 2.8,2.2 2.8,0 ; 2.8,-2.339 2.8,0
  Top Layer lines w0.4: -2.708,-1.671 ccw(c-4.7,0) -2.697,1.658 ; 2.697,-1.658 cw(c4.7,0) 2.708,1.671
  Top Layer lines w0.45: -2.703,-1.141 ccw(c-4.7,0) -2.703,1.141 ; -2.657,-0.51 ccw(c-4.9,0) -2.648,0.469 ; 2.648,-0.469 cw(c4.9,0) 2.657,0.51 ; 2.703,-1.141 cw(c4.7,0) 2.703,1.141
  silkscreen extent -3,-3 3,3
SMD_N64_START_CARBON_CONTACT [mm]
  round 1.4 hole 0.7: 1(-2.9,2.4) 2(2.9,-2.4)
  Top Layer lines w0.3: -0.657,2.064 ccw(c0,0) -1.761,1.261 ccw(c0,0) -0.622,-2.075 ; -0.651,-1.086 cw(c0,0) -0.651,1.086 ; -0.636,1.431 ccw(c0,0) -0.617,-1.439 ; -0.632,-0.211 cw(c0,0) -0.632,0.211 ; -0.629,-0.733 cw(c0,0) -0.629,0.733 ; -0.622,-2.386 cw(c0,0) -1.976,1.476 cw(c0,0) -0.622,2.386 ; -0.621,-1.76 cw(c0,0) -0.621,1.76 ; 0.617,1.439 cw(c0,0) 0.636,-1.431 ; 0.621,-1.76 ccw(c0,0) 0.621,1.76 ; 0.622,-2.386 ccw(c0,0) 1.976,-1.476 ccw(c0,0) 0.622,2.386 ; 0.622,2.075 cw(c0,0) 1.761,-1.261 cw(c0,0) 0.657,-2.064 ; 0.629,-0.733 ccw(c0,0) 0.629,0.733 ; 0.632,-0.211 ccw(c0,0) 0.632,0.211 ; 0.651,-1.086 ccw(c0,0) 0.651,1.086 ; -0.6,-2.7 cw(c0,0) -2.19,1.69 cw(c0,0) -0.6,2.7 ; -0.6,-2.7 -0.6,0 -0.6,2.7 ; -0.6,-2.7 -0.6,-2.9 cw(c0,0) -2.329,1.829 cw(c0,0) -0.6,2.9 -0.6,2.7 ; 0.6,-2.7 ccw(c0,0) 2.19,-1.69 ccw(c0,0) 0.6,2.7 ; 0.6,-2.7 0.6,0 0.6,2.7 ; 0.6,-2.7 0.6,-2.9 ccw(c0,0) 2.329,-1.829 ccw(c0,0) 0.6,2.9 0.6,2.7
  Top Layer lines w0.5: -2.9,2.4 -2.329,1.829 -2.19,1.69 -1.976,1.476 -1.761,1.261 -1.6,1.1 ; 1.6,-1.1 1.761,-1.261 1.976,-1.476 2.19,-1.69 2.329,-1.829 2.9,-2.4
  silkscreen extent -3.3,-3.3 3.3,3.3
SMD_QUARZ_3.2X2.5 [mm]
  rect 1.4x1.2 smd: 1(-1.1,-0.8) 2(1.1,-0.8) 3(1.1,0.8) 4(-1.1,0.8)
  silkscreen extent -1.6,-1.25 1.6,1.25
SMD_RES_0402 [mm]
  rect 0.55x0.5 smd: 1(-0.375,0) 2(0.375,0)
  silkscreen extent -0.5,-0.25 0.5,0.25, body extent -0.55,-0.3 0.55,0.3, height 0.4
SMD_RES_0603 [mm]
  rect 0.8x0.9 smd: 1(-0.6,0) 2(0.6,0)
  silkscreen extent -0.8,-0.4 0.8,0.4, body extent -0.9,-0.5 0.9,0.5, height 0.55
SMD_SOD_123 [mm]
  rect 0.6x0.6 smd: 1(-1.75,0) 2(1.75,0)
  silkscreen extent -2,-0.85 1.45,0.85, body extent -1.42,-0.85 1.43,0.85, height 1.35
SMD_SOD_323 [mm] "SMD_SOD_323"
  rect 0.6x0.6 smd: 1(0,0) 2(2.2,0)
  silkscreen extent 0.15,-0.75 2.1,0.75
SMD_SODFL_123 [mm]
  rect 0.55x1.1 smd: 1(-1.775,0) 2(1.775,0)
  silkscreen extent -1.45,-1 1.95,1, body extent -1.45,-0.97 1.45,0.97, height 1.4
SMD_SOT_23_3 [mm] "SOT23, 3-Leads, Body 2.90x2.35mm, Pitch 0.95mm, IPC High Density"
  rect 0.75x0.6 smd: 1(-1.075,0.95) 2(-1.075,-0.95) 3(1.075,0)
  silkscreen extent -1.22,-1.5 0.7,1.5, body extent -0.7,-1.5 0.7,1.5, height 1.1
SMD_SOT_23_5 [mm] "SMD_SOT_23_5"
  rect 0.75x0.6 smd: 1(-1.075,0.95) 2(-1.075,0) 3(-1.075,-0.95) 4(1.075,-0.95) 5(1.075,0.95)
  silkscreen extent -1.03,-1.5 0.3,1.5, body extent -0.7,-1.5 0.7,1.5, height 1.1
SMD_SOT_23_6 [mm]
  rect 0.75x0.6 smd: 1(-1.075,0.95) 2(-1.075,0) 3(-1.075,-0.95) 4(1.075,-0.95) 5(1.075,0) 6(1.075,0.95)
  silkscreen extent -1.02,-1.5 0.3,1.5, body extent -0.7,-1.5 0.7,1.5, height 1.1
SMD_UQFN-10 [mm]
  rect 0.7x0.2 smd: 1(-0.65,0.75) 2(-0.65,0.25) 3(-0.65,-0.25) 4(-0.65,-0.75) 6(0.65,-0.75) 7(0.65,-0.25) 8(0.65,0.25) 9(0.65,0.75)
  rect 0.2x0.85 smd: 5(0,-0.9) 10(0,0.9)
  silkscreen extent -1.12,1.28 -1.03,1.37, body extent -0.78,-1.02 0.77,1.03, height 0.6
SMD_WLCSP_6_1.0X1.5 [mm] "BGA, 6-Leads, Body 0.96x1.46mmx0.63mm, Pitch 0.50mm"
  round 0.26 smd: A1(-0.25,0.5) A2(0.25,0.5) B1(-0.25,0) B2(0.25,0) C1(-0.25,-0.5) C2(0.25,-0.5)
  silkscreen extent -0.48,-0.73 0.48,0.73, body extent -0.48,-0.73 0.48,0.73, height 0.63
THT_CON_P2.54_D0.9_1X2 [mm]
  rect 1.6x1.6 hole 0.9: 1(0,0)
  round 1.6 hole 0.9: 2(2.54,0)
  silkscreen extent -1.27,-1.25 3.81,1.25
THT_CON_P2.54_D0.9_1X6 [mm]
  rect 1.6x1.6 hole 0.9: 1(0,0)
  round 1.6 hole 0.9: 2(2.54,0) 3(5.08,0) 4(7.62,0) 5(10.16,0) 6(12.7,0)
  silkscreen extent -1.27,-1.25 13.97,1.25
THT_CON_P2.54_D0.9_2X3 [mm]
  rect 1.6x1.6 hole 0.9: 1(0,-2.54)
  round 1.6 hole 0.9: 2(0,0) 3(2.54,-2.54) 4(2.54,0) 5(5.08,-2.54) 6(5.08,0)
  silkscreen extent -1.27,-3.79 6.35,1.25

## Part data
BAT_CON: "Connector Header Surface Mount, Right Angle 2 position 0.059\" (1.50mm)", Supplier - Digikey=455-1693-1-ND, Type="SM4A 2 Pin"
BTN_L BTN_R BTN_Z RUMBLE1 RUMBLE2 X2 X3 X4: "Pitch 2.54, Diameter 0.9mm, 1 row, 2 columns", Type="Pitch 2.54, Diameter 0.9mm, 1 row, 2 columns"
C1: "SMD Capacitor, Ceramic", Value2=35V, Supplier - Digikey=445-172479-1-ND
C2 C8 C12 C15 C22 C27 C30: "1µF ±10% 16V Ceramic Capacitor X7R 0603 (1608 Metric)", Value2=16V, Supplier - Digikey=1276-1019-1-ND
C3 C18 C21: Value2=6.3V, Supplier - Digikey=1276-1045-1-ND
C4 C5 C6 C7 C9 C16 C17: "0.1µF ±10% 25V Ceramic Capacitor X7R 0402 (1005 Metric)", Value2=25V, Supplier - Digikey=490-14603-1-ND
C10: Value2=50V, Supplier - Digikey=311-1024-1-ND
C11: "820pF ±5% 50V Ceramic Capacitor C0G, NP0 0402 (1005 Metric)", Value2=50V, Supplier - Digikey=490-11407-1-ND
C13 C14: "12pF ±2% 50V Ceramic Capacitor C0G, NP0 0402 (1005 Metric)", Value2=50V, Supplier - Digikey=490-6197-1-ND
C19: "0.022µF ±10% 50V Ceramic Capacitor X7R 0402 (1005 Metric)", Value2=50V, Supplier - Digikey=490-3884-1-ND
C20 C23: "10µF ±10% 16V Ceramic Capacitor X7R 0805 (2012 Metric)", Value2=16V, Supplier - Digikey=1276-6472-1-ND
C26 C28 C29: "22µF ±10% 16V Ceramic Capacitor X5R 0805 (2012 Metric)", Value2=16V, Supplier - Digikey=1276-7092-1-ND
D1: "IC RF TxRx + MCU 802.15.4, Bluetooth Bluetooth v5.0 2.4GHz 73-VFQFN Dual Rows, Exposed Pad", Supplier - Digikey=1490-1071-1-ND, Type=nRF52840
G1: "32MHz ±10ppm Crystal 8pF 40 Ohms 4-SMD, No Lead", Supplier - Digikey=1908-1300-1-ND
H1 H2 H3 H4: "Red, Green, Blue (RGB) 624nm Red, 527nm Green, 470nm Blue LED Indication - Discrete 2.1V Red, 3.1V Green, 3V Blue 0404 (1010 Metric)", Supplier - Digikey=SMLP34RGB2W3CT-ND
  H1: Type=SMLP34RGB2W3
JOY_CON: "Pitch 2.54, Diameter 0.9mm, 1 row, 6 columns", Type="Pitch 2.54, Diameter 0.9mm, 1 row, 3 columns"
L1 L2: "SMD Inductor", Value2=1A, Supplier - Digikey=732-2956-1-ND
N1: "Boost Switching Regulator IC Positive Adjustable 1.8V 1 Output 100mA (Switch) SOT-23-6", Supplier - Digikey=MCP16251T-I/CHCT-ND, Type=MCP16251
N2: "35V/3.2A MULTI-CELL LITHIUM-ION", Supplier - Digikey=LTC4162EUFD-LAD#PBF-ND, Type=LTC4162EUFD-LAD
N3 N5: library part N_FPF1320UCX_WLCSP-6, "Power Switch/Driver 2:1 P-Channel 1.5A 6-WLCSP (0.96x1.66)", Supplier - Digikey=FPF1320UCXCT-ND, Type=FPF1320
N6: "IC SUPERVISOR MICROPOWER SOT23-5", Supplier - Digikey=576-2684-1-ND, Type=MIC2775-46YM5-TR
N7: library part N_AP2210K-3.3_SOT-23-5, "IC REG LINEAR 3.3V 300MA SOT23-5", Supplier - Digikey=AP2210K-3.3TRG1DICT-ND, Type=AP2210K-3.3
N8: "IC SUPERVISOR MANUAL RST SOT23-5", Supplier - Digikey=ADM6319B31ARJZ-RL7DKR-ND, Type=ADM6319
R1 R40 R41: library part R_SMD_DUMMY_0402, "Dummy 0402"
R2 R3 R25 R26 R27 R47 R48 R49 R50: "SMD Resistor", Value2=63mW, Supplier - Digikey=P10KDECT-ND
R4 R5 R6 R23 R44: "22 Ohms ±1% 0.063W, 1/16W Chip Resistor 0402 (1005 Metric) Moisture Resistant Thick Film", Value2=63mW, Supplier - Digikey=311-22.0LRCT-ND
R7 R11 R15 R19: "56 Ohms ±0.5% 0.063W, 1/16W Chip Resistor 0402 (1005 Metric) Thin Film", Supplier - Digikey=311-56UCT-ND
R8 R12 R16 R20: "39 Ohms ±0.5% 0.063W, 1/16W Chip Resistor 0402 (1005 Metric) Thin Film", Supplier - Digikey=311-39UCT-ND
R9 R13 R17 R21: "240 Ohms ±0.5% 0.063W, 1/16W Chip Resistor 0402 (1005 Metric) Automotive AEC-Q200 Thin Film", Supplier - Digikey=P240DECT-ND
R10 R14 R18 R22: "5.6 kOhms ±0.5% 0.063W, 1/16W Chip Resistor 0402 (1005 Metric) Automotive AEC-Q200 Thin Film", Value2=63mW, Supplier - Digikey=RNCF0402DTE5K60CT-ND
R24: "68 mOhms ±1% 0.25W, 1/4W Chip Resistor 0603 (1608 Metric) Current Sense Thin Film", Value2=250mW, Supplier - Digikey=408-1445-1-ND
R28: "47 mOhms ±1% 0.2W, 1/5W Chip Resistor 0603 (1608 Metric) Automotive AEC-Q200, Current Sense Thick Film", Value2=200mW, Supplier - Digikey=P47LJCT-ND
R29: "47 kOhms ±0.5% 0.063W, 1/16W Chip Resistor 0402 (1005 Metric) Automotive AEC-Q200 Thin Film", Value2=100mW, Supplier - Digikey=P47KDECT-ND
R30 R32 R34 R35 R38 R39: "100 kOhms ±1% 0.063W, 1/16W Chip Resistor 0402 (1005 Metric) Thin Film", Value2=63mW, Supplier - Digikey=YAG2307CT-ND
R31: "1.5 MOhms ±1% 0.1W, 1/10W Chip Resistor 0402 (1005 Metric) Anti-Sulfur Thin Film", Value2=63mW, Supplier - Digikey=749-1557-1-ND
R33: "910 kOhms ±1% 0.063W, 1/16W Chip Resistor 0402 (1005 Metric) Moisture Resistant Thick Film", Value2=63mW, Supplier - Digikey=YAG3257CT-ND
R36 R37: "10 Ohms ±0.5% 0.063W, 1/16W Chip Resistor 0402 (1005 Metric) Thin Film", Value2=63mW, Supplier - Digikey=311-10UCT-ND
R42 R43: "5.1 kOhms ±0.5% 0.063W, 1/16W Chip Resistor 0402 (1005 Metric) Automotive AEC-Q200 Thin Film", Value2=63mW, Supplier - Digikey=RNCF0402DTE5K10CT-ND
R45 R46: "1 kOhms ±0.5% 0.063W, 1/16W Chip Resistor 0402 (1005 Metric) Automotive AEC-Q200 Thin Film", Value2=63mW, Supplier - Digikey=P1.0KDECT-ND
S1 S2 S3 S4 S5 S6 S7 S8 S9 S10 S11 S12 S13 S14: "N64 DPAD Carbon ink contact"
USB1: library part X_CONNECTOR_USB_TYPEC_VERTICAL, "USB - C (Type - C) USB 3.1 (USB 3.1 Gen 2, Superspeed+) Receptacle Connector 24 Position Surface Mount, Through Hole", Supplier - Digikey=609-5380-1-ND, Type="USB C"
V1 V2 V17 V18: "Diode Schottky 30V 200mA (DC) Surface Mount SOD-123", Value2=200mA, Supplier - Digikey=BAT42W-FDICT-ND, Type=BAT42W-7-F
V3 V12: "SMD Diode, 75V, 0.15A", Supplier - Digikey=1N914BWSCT-ND, Type=1N914
V4 V5 V6 V7: "SMD PNP Transistor BC857B 100mA 45V", Supplier - Digikey=BC857BLT3GOSCT-ND, Type=BC857B
V8 V9 V15 V16: "N-Channel Logic Level Enhancement Mode Field Effect Transistor", Supplier - Digikey=FDN357NCT-ND, Supplier - E+H-flowtec SAP=50110216, Type=FDN357N
V10 V14: "Diode Standard 1000V 1A Surface Mount SOD-123FL", Supplier - Digikey=1655-1N4007FLCT-ND, Type=1N4007
V11 V13: "NPN Transistor", Supplier - Digikey=BC847BLT1GOSCT-ND, Supplier - E+H-flowtec SAP=50019820, Type=BC847B
V19: "Clamp Ipp Tvs Diode Surface Mount 10-UQFN (2.0x1.5)", Supplier - Digikey=296-21888-1-ND, Type=TPD6E001RSER
W1: "Single Layer Printed IFA, 1 mm Substrate"
X1: "J-Link 6-pin Needle Adapter (8.06.16)", Supplier - Segger=8.06.16
X5: "Pitch 2.54, Diameter 0.9mm, 2 row, 3 columns", Type="Pitch 2.54, Diameter 0.9mm, 2 row, 3 columns"
Z1 Z3: "Ferrite Beads", Value2=2A, Supplier - Digikey=445-1565-1-ND, Supplier - E+H Flowtec AG=50104604, Type=MPZ1608S221A
A1: Type=RKJXK122400Y

## Free pads (board coordinates)
  round 2 hole 2 unplated: 0(-14.75,6) 0(14.75,6) 1(-6.875,18.05) 1(6.875,18.05) 1(23.9,41.1) 1(29.7,41.1) 1(40.5,19.5) 1(52.3,28.7)
  round 4.8 hole 4.8 unplated: 1(-35,36.6) 1(35,36.6)
  round 4 hole 4 unplated: 1(-20,51.05) 1(20,51.05)

## Via types
v1: diameter 0.4, hole 0.2, Top Layer to Bottom Layer, 24 vias
v2: diameter 0.6, hole 0.3, Top Layer to Bottom Layer, 11 vias
v3: diameter 0.5, hole 0.2, Top Layer to Bottom Layer, 6 vias

## Nets (pads, with @x,y where several pads share a name; then routed paths per layer and width w, separated by ;. In a path a pad name is that pad's centre, name@x,y a point inside that pad or via, vN(x,y) a via of type N, cw(c..) or ccw(c..) an arc to the next point about the centre after c; other vN are vias at no path point)
+3V3: BTN_L.1 BTN_R.1 BTN_Z.1 C4.2 C5.2 C6.2 C7.2 C8.2 C15.2 C16.2 D1.A22 D1.AD14 D1.AD23 D1.B1 D1.W1 D1.Y2 JOY_CON.2 N2.15 N5.B2 R25.2 R26.2 R27.2 R47.1 R48.1 S4.1 S5.1 S6.1 S7.1 S8.1 S9.1 S11.1 S12.1 S13.1 S14.1 V1.2 V2.2 V4.2 V5.2 V6.2 V7.2 V17.2 V18.2 | length 4.4
  Top Layer w0.2: 0.8,36.6 3.696,36.6 4.046,36.25 N2.15
+3V3_N64: C2.2 N5.C2 N8.5 Z1.2
+3V3_REG: C26.2 N5.A2 N7.5 V12.1
+5V: C28.2 C29.2 N3.B2 RUMBLE1.1 RUMBLE2.1 V10.2 V14.2
+5V_REG: C23.2 N1.5 N3.A2 R31.1
+5V_USB: C17.2 C30.2 D1.AD2 N2.7 N3.C2 N6.5 V8.2 Z3.2 | length 1.7
  Top Layer w0.25: N2.7 C17.2@5.55,41.26
  Top Layer w0.3: v2(4.91,41.31) C17.2
+VBAT: C1.2 C18.2 C27.2 L2.1 N1.6 N2.3 N2.4 N2.27 N2.28 N7.1 R24.2 S10.1 V9.3 V12.2 | length 9.7
  Top Layer w0.2: N2.4 v1@7.05,41.35
  Top Layer w0.25: v1(7.5,41) 7.55,40.95 N2.3 ; v1(11,40.4) R24.2@11.4,40.4
  Bottom Layer w0.2: v1(7.1,41.4) 7.741,41.4 8.541,40.6 9.472,40.6 ; 9.472,40.6 10.2,40.6 10.4,40.4 v1(11,40.4)
  Bottom Layer w0.4: v1(7.5,41) 9.3,39.2 v1(9.7,39.2)
ANT: D1.H23 R1.1 R40.2
BTN_A: D1.V23 S8.2 | length 22.7
  Top Layer w0.3: 30.65,25.65 44.1,12.2 S8.2
BTN_B: D1.U24 S9.2 | length 6.5
  Top Layer w0.3: 30.3,25.3 32.1,23.5 S9.2
BTN_CD: D1.P23 S5.2 | length 31.3
  Top Layer w0.3: 30.968,25.968 33.936,23 47.4,23 49.7,25.3 55.2,25.3 55.9,24.6 S5.2
BTN_CL: D1.P2 S6.2 | length 20.7
  Top Layer w0.3: 31.923,26.923 34.496,24.35 46.677,24.35 47.9,25.573 S6.2
BTN_CR: D1.R1 S7.2 | length 39.5
  Top Layer w0.3: 31.286,26.286 34.123,23.45 47.05,23.45 49.4,25.8 55.7,25.8 57.4,24.1 62.9,24.1 63.9,25.1 S7.2
BTN_CU: D1.R24 S4.2 | length 35.3
  Top Layer w0.3: 31.605,26.605 34.309,23.9 46.864,23.9 49.214,26.25 53.25,26.25 54.6,27.6 54.6,31.5 55.9,32.8 S4.2
BTN_DD: D1.B19 S12.2 | length 28.5
  Top Layer w0.3: S12.2 -45,26.2 -40.5,30.7 -28.9,30.7
BTN_DL: D1.B17 S13.2 | length 30.7
  Top Layer w0.3: S13.2 -42.5,29.6 -40.9,31.2 -28.9,31.2
BTN_DR: D1.A16 S14.2 | length 9.6
  Top Layer w0.3: S14.2 -37.2,29.6 -36.6,30.2 -28.9,30.2
BTN_DU: D1.A20 S11.2 | length 18
  Top Layer w0.3: S11.2 -43.6,36.3 -39,31.7 -28.9,31.7
BTN_L: BTN_L.2 D1.Y23
BTN_R: BTN_R.2 D1.W24
BTN_S: D1.AD22 R2.2 S10.2 V1.1
BTN_Z: BTN_Z.2 D1.T23
CC1: R23.1 USB1.A5 V19.1 | length 15.7
  Top Layer w0.2: v1(-0.6,54.6) -0.6,54.05 -0.75,53.9 -0.75,52.85 -0.6,52.7 -0.6,50.5 -0.05,49.95 v1(-0.05,49.2) -0.05,47.65 ; V19.1 2.25,49.25 v1(2.3,49.2) ; 8.75,63.7 8.75,68.4
  Bottom Layer w0.2: USB1.A5 -0.7,53.92 -0.7,54.55 -0.65,54.6 v1(-0.6,54.6) ; v1(-0.05,49.2) v1(2.3,49.2)
CC2: R44.1 USB1.B5 V19.3 | length 22.1
  Top Layer w0.2: -0.95,47.65 v1(-0.95,48.75) -0.95,49.65 -3.2,51.9 -3.2,52.811 -2.8,53.211 -2.8,55.195 -1.895,56.1 0.65,56.1 v1(0.75,56.2) ; v1(3.25,48.75) V19.3
  Bottom Layer w0.2: v1(-0.95,48.75) v1(3.25,48.75) ; USB1.B5 v1@0.75,56.1 ; 6.7,64.945 10.455,64.945
D_N: D1.AD4 USB1.A7 USB1.B7 V19.8 | length 20.5
  Top Layer w0.2: v1(0.3,53.2) 0.3,52.9 0.25,52.85 0.25,51.15 0.9,50.5 0.9,48.3 ; V19.8 v1(2.75,51.55) v1@2.75,51.65 ; 9.85,61.9 9.85,68.05
  Bottom Layer w0.2: USB1.B7 -0.25,54.886 -0.15,54.786 -0.15,54.7 0,54.55 0,54.545 0.004,54.545 0.25,54.299 USB1.A7 0.25,53.65 0.3,53.6 v1(0.3,53.2) ; v1(0.3,51.2) 1.65,51.2 2,51.55 v1(2.75,51.55) ; 7.21,66.6 9.9,66.6 ; 9.85,68.4 9.85,69.07
D_P: D1.AD6 USB1.A6 USB1.B6 V19.2 | length 18.8
  Top Layer w0.2: 0.4,48.3 0.4,50.293 -0.25,50.943 -0.25,52.85 -0.3,52.9 v1(-0.3,53.2) -0.3,53.75 v1(0.7,54.75) ; V19.2 2.75,50.15 2.878,50.278 v1(2.878,50.322) ; 9.35,61.9 9.35,68.05
  Bottom Layer w0.2: v1(-0.3,53.2) -0.3,53.82 USB1.A6 ; USB1.B6 0.25,55.05 v1@0.55,54.75 ; v1(0.4,50.3) 2.855,50.3 v1(2.878,50.322) ; v1@0.55,54.75 v1(0.7,54.75) ; 9.4,68.5 9.4,69.12
GND: BAT_CON.2 BAT_CON.S1 BAT_CON.S2 C1.1 C2.1 C3.1 C4.1 C5.1 C6.1 C7.1 C8.1 C9.2 C10.1 C11.1 C12.1 C13.1 C14.1 C15.1 C16.1 C17.1 C18.1 C20.1 C21.1 C22.1 C23.1 C26.1 C27.1 C28.1 C29.1 C30.1 D1.B7 D1.EXP D1.F23 G1.2 G1.4 JOY_CON.3 N1.2 N2.16 N2.23 N2.24 N2.29 N3.C1 N5.C1 N6.2 N7.2 N7.4 N8.2 R29.1 R33.1 R38.1 R39.1 R40.1 R41.1 R42.1 R43.1 R46.1 R49.2 R50.2 USB1.1 USB1.A1 USB1.A12 USB1.B1 USB1.B12 V11.2 V13.2 V15.2 V16.2 V19.5 W1.1 X1.5 | length 1.4
  Top Layer w0.2: v2(-29.1,79.9) -28.575,79.9 R33.1
  Top Layer w0.25: N2.16 N2.29@5.55,36.95
  other v2: -29.1,77.7
  other v3: 5.7,37.65 6.8,37.65 7.9,37.65 5.7,38.75 6.8,38.75 7.9,38.75
JM_3V3: A1.1 A1.6 A1.7 A1.8 X5.2
JM_BTN: A1.9 A1.10 X5.4
JM_GND: A1.3 A1.4 A1.11 X5.3
JM_X: A1.5 X5.5
JM_Y: A1.2 X5.6
JOY_BTN_OR_QX: D1.A8 JOY_CON.4
JOY_IX: D1.B9 JOY_CON.1
JOY_X_OR_IY: D1.B11 JOY_CON.5
JOY_Y_OR_QY: D1.A10 JOY_CON.6
L\E\D\1\_\E\N\: D1.T2 R10.2
L\E\D\2\_\E\N\: D1.U1 R14.2
L\E\D\3\_\E\N\: D1.AD8 R18.2
L\E\D\4\_\E\N\: D1.AC9 R22.2
LED_B: D1.L1 R7.1 R11.1 R15.1 R19.1
LED_G: D1.M2 R8.1 R12.1 R16.1 R20.1
LED_R: D1.N1 R9.1 R13.1 R17.1 R21.1
MOT1-: RUMBLE1.2 V10.1 V15.3
MOT2-: RUMBLE2.2 V14.1 V16.3
N64_COM: D1.A12 USB1.A3 USB1.B3 V19.6 | length 19.9
  Top Layer w0.2: -0.5,47.6 -0.5,49.8 -1.7,51 -1.7,51.978 -1.65,52.028 -1.65,53.1 v1(-1.8,53.25) -1.8,53.8 -2.45,54.45 -2.45,55.05 -1.782,55.718 1.746,55.718 ; v1(1.75,56.2) 1.746,56.196 1.746,55.718 ; V19.6 3.75,53.714 1.746,55.718
  Bottom Layer w0.2: v1(-1.8,53.25) USB1.A3@-1.8,53.62 ; USB1.A3@-1.75,53.77 -1.8,53.82 USB1.A3 ; USB1.B3 v1(1.75,56.2)
N64_CONNECTED: N5.B1 N8.1 R35.1
N64_VCC: USB1.A2 USB1.B2 V19.7 Z1.1 | length 10.8
  Top Layer w0.2: v1(2,54.7) 3.25,53.45 V19.7
  Top Layer w0.3: v1(-2,54.7) -2,54.816 -1.499,55.318 1.581,55.318 2,54.899 v1(2,54.7)
  Bottom Layer w0.2: USB1.B2 USB1.B2@2.3,55.48
  Bottom Layer w0.3: USB1.A2 -2.25,54.45 v1(-2,54.7) ; v1(2,54.7) 2.25,54.95 USB1.B2
NetBAT_CON_1: BAT_CON.1 C20.2 N2.19 N2.20 R28.1 | length 6.6
  Top Layer w0.25: C20.2@5.85,33.6 5.85,34.55 7.05,35.75 N2.19 ; R28.1@7.55,33.75 N2.20
  Top Layer w0.7: C20.2@6.25,33.4 R28.1
NetC3_2: C3.2 D1.AC5
NetC9_1: C9.1 D1.C1
NetC10_2: C10.2 D1.D23
NetC11_2: C11.2 D1.N24
NetC12_2: C12.2 D1.B5 D1.E24
NetC13_2: C13.2 D1.A23 G1.1
NetC14_2: C14.2 D1.B24 G1.3
NetC19_1: C19.1 N2.1
NetC19_2: C19.2 L1.1 N2.25 N2.26 | length 6.2
  Top Layer w0.5: v2(9.7,40.05) 10.26,40.05 C19.2 ; L1.1@9.9,34.955 v2(9.9,35.8)
  Bottom Layer w0.5: v2@9.65,40.05 v2(9.7,40.05) 10.3,39.45 10.3,38.6 v2(9.9,38.2) v2(9.9,35.8)
NetC21_2: C21.2 N2.2 N2.17 N2.18 | length 1.2
  Top Layer w0.2: v1(6.05,35.55) N2.17 N2.18
NetC22_2: C22.2 N2.8
NetD1_B13: D1.B13 R23.2 R42.2 V17.1
NetD1_J1: D1.J1 R43.2 R44.2 V18.1
NetH1_1: H1.1 V4.3
NetH1_2: H1.2 R9.2
NetH1_3: H1.3 R8.2
NetH1_4: H1.4 R7.2
NetH2_1: H2.1 V5.3
NetH2_2: H2.2 R13.2
NetH2_3: H2.3 R12.2
NetH2_4: H2.4 R11.2
NetH3_1: H3.1 V6.3
NetH3_2: H3.2 R17.2
NetH3_3: H3.3 R16.2
NetH3_4: H3.4 R15.2
NetH4_1: H4.1 V7.3
NetH4_2: H4.2 R21.2
NetH4_3: H4.3 R20.2
NetH4_4: H4.4 R19.2
NetL1_2: L1.2 N2.21 R28.2 V9.2 | length 2.5
  Top Layer w0.25: R28.2@8.05,33.75 N2.21
NetL2_2: L2.2 N1.1
NetN1_3: N1.3 R30.2 V11.3 | length 0.6
  Top Layer w0.2: N1.3 -27.4,76.775 v2(-27.4,77.3)
NetN1_4: N1.4 R31.2 R33.2
NetN2_5: N2.5 R24.1 V8.3 | length 9
  Top Layer w0.2: N2.5 6.55,41.65 v1(6.8,41.9)
  Top Layer w0.25: v1(11,41) R24.1@11.4,41
  Top Layer w0.6: R24.1 V8.3@11.7,43.425
  Bottom Layer w0.2: v1(6.8,41.9) 7.736,41.9 8.636,41 v1(11,41)
NetN2_6: N2.6 V8.1 | length 3.8
  Top Layer w0.25: N2.6 6.05,43.95
NetN2_9: N2.9 R45.1 | length 1.5
  Top Layer w0.2: R45.1 3.925,39.45 N2.9
NetN2_10: N2.10 R45.2 R46.2 | length 2.5
  Top Layer w0.2: R45.2 2.425,40.071 2.796,39.7 2.925,39.7 3.175,39.45 R46.2 ; R46.2@3.325,38.95 N2.10
NetN2_11: N2.11 R29.2 | length 1.2
  Top Layer w0.2: R29.2 3.325,38.45 N2.11
NetN2_22: N2.22 V9.1 | length 3.5
  Top Layer w0.25: N2.22@8.6,36.4 10.575,36.4 11.625,35.35
NetN7_3: N7.3 R34.2 V13.3
NetR1_2: R1.2 R41.2 W1.2
NetR2_1: R2.1 V3.1
NetR4_2: R4.2 X1.2
NetR5_2: R5.2 X1.4
NetR6_2: R6.2 X1.6
NetR10_1: R10.1 V4.1
NetR14_1: R14.1 V5.1
NetR18_1: R18.1 V6.1
NetR22_1: R22.1 V7.1
NetR32_2: R32.2 V11.1
NetR35_2: R35.2 V13.1 | length 0.9
  Top Layer w0.25: V13.1 -18.375,66.8 R35.2@-17.675,66.8
NetR36_2: R36.2 R38.2 V15.1
NetR37_2: R37.2 R39.2 V16.1
NetS1_1: S1.1 X2.1
NetS1_2: S1.2 X2.2
NetS2_1: S2.1 X3.1
NetS2_2: S2.2 X3.2
NetS3_1: S3.1 X4.1
NetS3_2: S3.2 X4.2
P\W\R\_\A\L\E\R\T\: D1.G1 N2.12 R27.1 | length 3.7
  Top Layer w0.2: 0.8,37.7 3.5,37.7 3.75,37.95 N2.12
PWR_5V_REG_EN: D1.AD20 R30.1
PWR_EN: D1.AC19 R3.2 V2.1
PWR_MUX_EN: D1.AC21 N3.A1 N5.A1 R3.1 R34.1 V3.2
PWR_SCL: D1.AD18 N2.13 R26.1 | length 3.6
  Top Layer w0.2: 0.8,37.3 3.7,37.3 3.85,37.45 N2.13
PWR_SDA: D1.AC17 N2.14 R25.1 | length 3.6
  Top Layer w0.2: 0.8,36.95 N2.14
R\E\S\E\T\: D1.AC13 X1.3
REV0: D1.AC15 R48.2 R50.1
REV1: D1.AD16 R47.2 R49.1
RUMBLE1: D1.B15 R36.1
RUMBLE2: D1.A14 R37.1
SWDCLK: D1.AA24 R5.1
SWDIO: D1.AC24 R4.1
SWO: D1.D2 R6.1
USB_CONNECTED: N3.B1 N6.1 R32.1
VBUS: USB1.A4 USB1.A9 USB1.B4 USB1.B9 V19.10 Z3.1 | length 20.1
  Top Layer w0.4: v2(-1.25,54.718) -1.2,54.668 -1.2,52.6 -1.05,52.45 -1.05,51.85 v2(-1.15,51.75) ; v2(0.9,51.75) 0.9,53.2 1.35,53.65 v2(1.35,54.7)
  Top Layer w0.6: v2(0.9,51.75) 1.6,51.05 1.6,48.3 ; 5.2,62.8 5.2,67.4
  Bottom Layer w0.3: USB1.A4 v2(-1.25,54.718) USB1.B9 ; USB1.A9 USB1.B4 ; v2@1.3,54.65 v2(1.35,54.7) v2@1.3,54.75
  Bottom Layer w0.4: v2(-1.15,51.75) v2(0.9,51.75)
pads on no net: A1.12 D1.A18 D1.AB2 D1.AC11 D1.AD10 D1.AD12 D1.B3 D1.F2 D1.H2 D1.J24 D1.K2 D1.L24 N6.3 N6.4 N8.3 N8.4 USB1.A8 USB1.A10 USB1.A11 USB1.B8 USB1.B10 USB1.B11 V19.4 V19.9 X1.0 X1.1 X5.1

## Polygon pours and split planes (outlines as drawn)
NetL1_2 on Top Layer "NETL1_2_L01_P018" (solid, pour order 18): 12,33.8 11.9,33.9 8.8,33.9 8.7,33.8 8.7,33 8.9,32.8 11.7,32.8 12,33.1
NetC21_2 on Top Layer "NETC21_2_L01_P016" (solid, pour order 16): 8.2,39.75 8.2,40.55 8.75,41.1 8.75,41.9 7.85,41.9 7.85,39.75
NetC19_1 on Top Layer "NETC19_1_L01_P010" (solid, pour order 10): 8.7,39.75 9.45,40.5 10.55,40.5 10.55,41.1 9,41.1 8.4,40.5 8.4,39.75
NetC19_2 on Top Layer "NETC19_2_L01_P000" (solid, pour order 0): 8.85,38.6 8.85,37.8 10.1,37.8 10.3,38 10.3,38.4 10.1,38.6
GND on Top Layer "Top Layer-No Net" (solid, pour order 28): -28.8,76.2 -28.8,75.2 -24.7,75.2 -24.7,77.4 -26.7,77.4 -26.7,76.2 -26.9,76 -27.8,76 -28,76.2 -28,77.3 -28.8,78.1 -31.1,78.1 -31.1,77.2 -28.9,77.2 -28.8,77.1
NetL2_2 on Top Layer "Top Layer-No Net" (solid, pour order 34): -31.3,77.8 -31.3,77.1 -29,77.1 -29,76.3 -32.7,76.3 -33.1,76.7 -33.1,77.8
+5V_REG on Top Layer "Top Layer-No Net" (solid, pour order 30): -26.5,79 -26.5,80.1 -25.2,80.1 -25.2,77.8 -28.2,77.8 -28.7,78.3 -28.7,79.3 -28.1,79.3 -28.1,78.7 -27.8,78.4 -27.1,78.4
NetN1_4 on Top Layer "Top Layer-No Net" (solid, pour order 32): -27.8,78.5 -27.8,79.3 -28,79.5 -28,80.1 -26.7,80.1 -26.7,79.5 -27.1,79.1 -27.1,78.5
+VBAT on Top Layer "Top Layer-No Net" (solid, pour order 26): -29,78.45 -31.1,78.45 -31.3,78.25 -33.1,78.25 -33.1,79.4 -29,79.4

## Silkscreen, mask and mechanical layers (free items; w line width, h text height)
Mechanical 1:
  lines w0.1: -69.748,30.088 -69.748,20.5 ccw(c-54.373,20.425) -67.239,12.006 ; -69.742,30.075 cw(c-58.3,29.775) -66.268,37.992 ; -67.248,12 -62.175,12 cw(c-62.175,9.2) -59.375,9.2 -59.375,3.85 ; -66.25,38 -42.65,49 -27.998,49 -27.998,57.175 ; -59.373,3.829 -59.367,3.825 ; -59.367,3.827 ccw(c-45.572,26.761) -45.581,-0.002 ; -45.572,0 -25.198,0 -19.998,5.2 -19.998,12 0.002,12 ; -28,57.175 -25.173,60 0.002,60 ; 0,12 20,12 20,5.2 25.2,0 45.574,0 ; 0,60 25.175,60 28,57.175 28,49 42.652,49 66.252,38 ; 6.89,-29.7 16.9,-19.39 16.9,8.9 -16.9,8.9 -16.9,-19.39 -6.89,-29.7 -3.35,-29.7 -3.35,-28 cw(c0,-28) 3.35,-28 3.35,-29.7 6.9,-29.7 ; 45.583,-0.002 ccw(c45.574,26.761) 59.368,3.827 ; 59.377,3.85 59.377,9.2 cw(c62.177,9.2) 62.177,12 67.25,12 ; 66.27,37.992 cw(c58.302,29.775) 69.744,30.075 ; 67.241,12.006 ccw(c54.375,20.425) 69.75,20.5 69.75,30.075 ; -36,-24.7 -36,-3.1 -20,-3.1 -20,-24.7 -36,-24.7

## Dimensions
0,12 to -67.239,12.006 on Mechanical 2
66.252,38 to 45.583,-0.002 on Mechanical 2
45.583,-0.002 to 42.652,49 on Mechanical 2
0,12 to -62.173,12 on Mechanical 2
0,12 to -59.367,3.827 on Mechanical 2
0,12 to -45.581,-0.002 on Mechanical 2
0,12 to -25.198,0 on Mechanical 2
0,12 to -19.998,5.2 on Mechanical 2
0,60 to -69.748,30.088 on Mechanical 2
0,60 to -66.25,38 on Mechanical 2
0,60 to -42.65,49 on Mechanical 2
0,60 to -28,57.175 on Mechanical 2
0,60 to -25.173,60 on Mechanical 2
25.2,0 to 20,12 on Mechanical 2
25.2,0 to 20,5.2 on Mechanical 2
25.175,60 to 45.583,-0.002 on Mechanical 2
28,57.175 to 45.583,-0.002 on Mechanical 2
70,30 to 45.583,-0.002 on Mechanical 2
69.75,20.5 to 45.583,-0.002 on Mechanical 2
67.25,12 to 45.583,-0.002 on Mechanical 2
59.377,9.2 to 45.583,-0.002 on Mechanical 2
59.368,3.827 to 45.583,-0.002 on Mechanical 2
-69.748,20.5 to 69.75,20.5 on Mechanical 2